# EAGLE board vco1_panel (EAGLE 7.3.0)
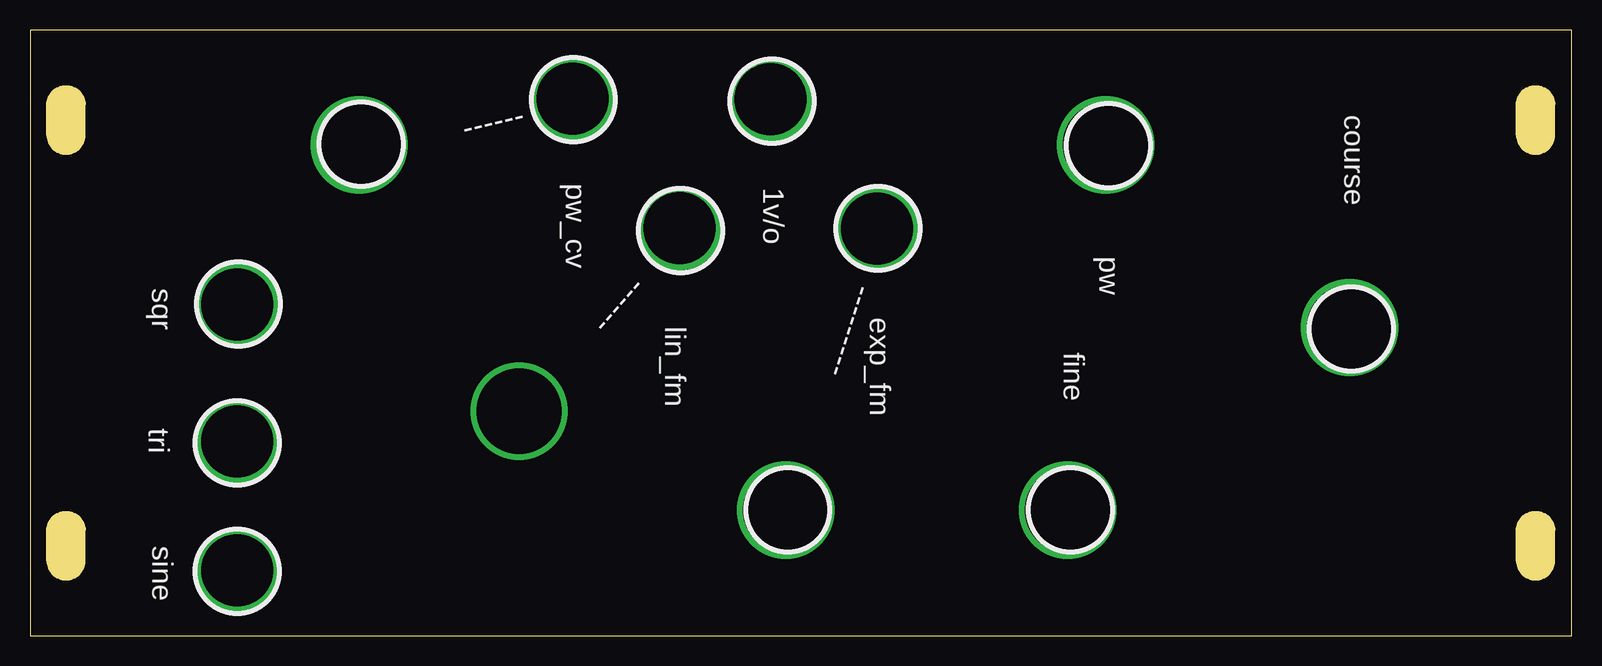
[diagram p0: board, top side]
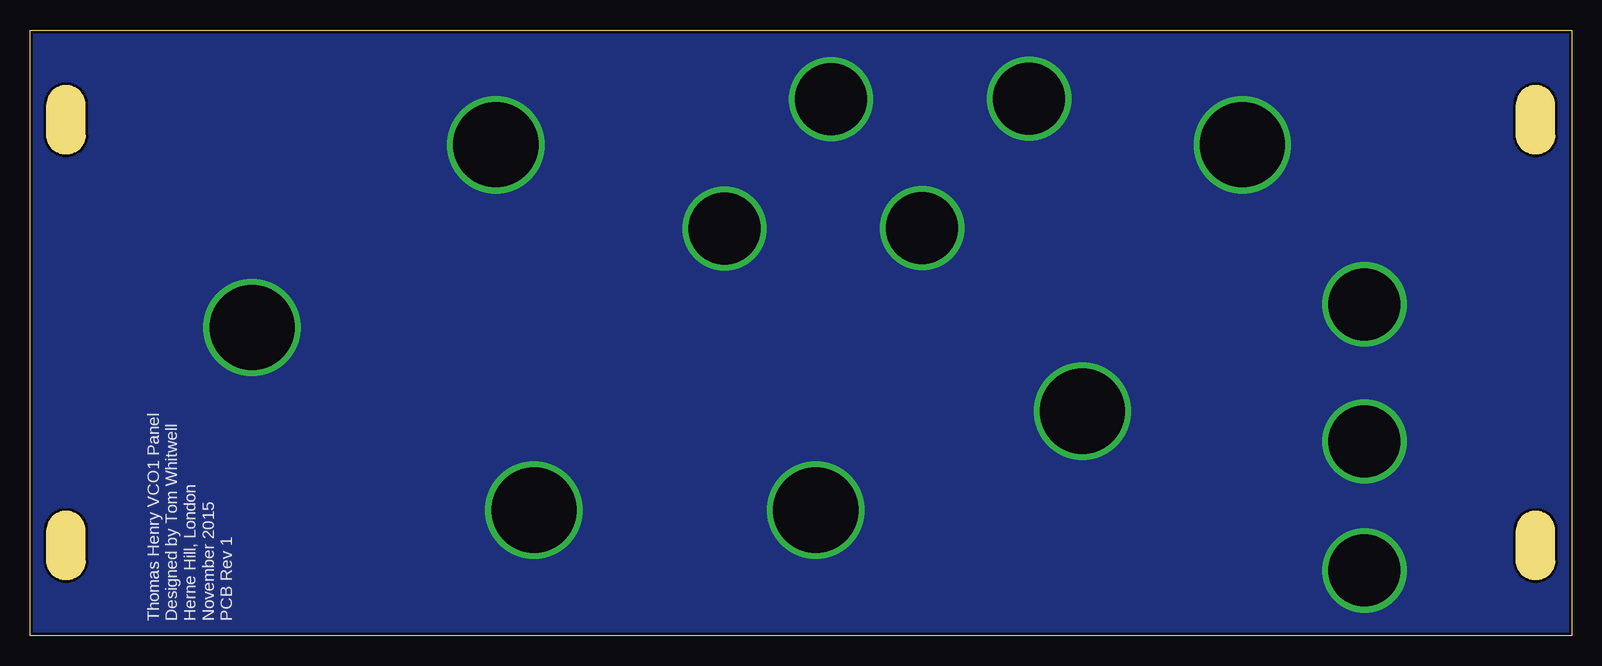
[diagram p1: board, bottom side, seen from below]

Size 128.5 x 50.5 mm. Coordinates in mm from the lower left corner, seen from the top.
Outline: 0,0 128.5,0 128.5,50.5 0,50.5 0,0
Copper layers (1*2*15*16): Top 0.035mm / dielectric 0.2mm / Route2 0.0175mm / dielectric 1.1mm / Route15 0.0175mm / dielectric 0.2mm / Bottom 0.035mm
Design rules "SeeedStudio_DRU_no_angle_20130527": minimum track width 6mil, minimum drill 12mil, track to track 6mil, track to pad 6mil, pad to pad 6mil, via to via 6mil, smd to smd 0mil, copper to edge 10mil, drill to drill 10mil, minimum pad ring 6mil, minimum via ring 6mil, stop-mask expansion 2mil, vias tented up to drill 25mil, thermal gap 10mil
Net classes: 1 power: width 0.406 mm; 2 ground: width 0.305 mm

## Placement (x,y rotation side)
U$1  [SLOT_HOLE]  3,43 90 top
U$2  [SLOT_HOLE]  125.5,43 90 top
U$3  [SLOT_HOLE]  3,7.5 90 top
U$4  [SLOT_HOLE]  125.5,7.5 90 top

## Library data of the parts
U$1-U$4 = MusicThingModular

## Tracks (layer width: path | path; a pad name or v marks a point on that pad's centre or on a via)
GND  (via drill 6, 7.1)
  other vias: 17.25,27.62 17.25,16.19 17.25,5.42 45.22,44.77 61.73,44.74 54.13,33.97 70.62,33.95 27.44,40.93 40.77,18.71 63,10.45 86.49,10.45 109.99,25.69 89.67,40.93
  pour Bottom: -1.77,55.55 133.49,58.09 133.49,-2.88 -1.77,-5.42

## Text on the board
bPlace: Thomas Henry VCO1 Panel / Designed by Tom Whitwell / Herne Hill, London / November 2015 / PCB Rev 1
tNames: ------ | course | 1v/o | pw_cv | pw | ------ | --------- | sqr | lin_fm | exp_fm | fine | tri | sine